# Altium PCB carsystem.PcbDoc
Units mil, origin at the board's own origin, x right, y up, seen from the top; angles counter-clockwise.
Board outline 6000 x 4000 mil, 2 copper layers (Top Layer, Bottom Layer); 3 components, 10 nets, 80 pads, 0 vias.
Unrouted connection lines stored in the file: 9.
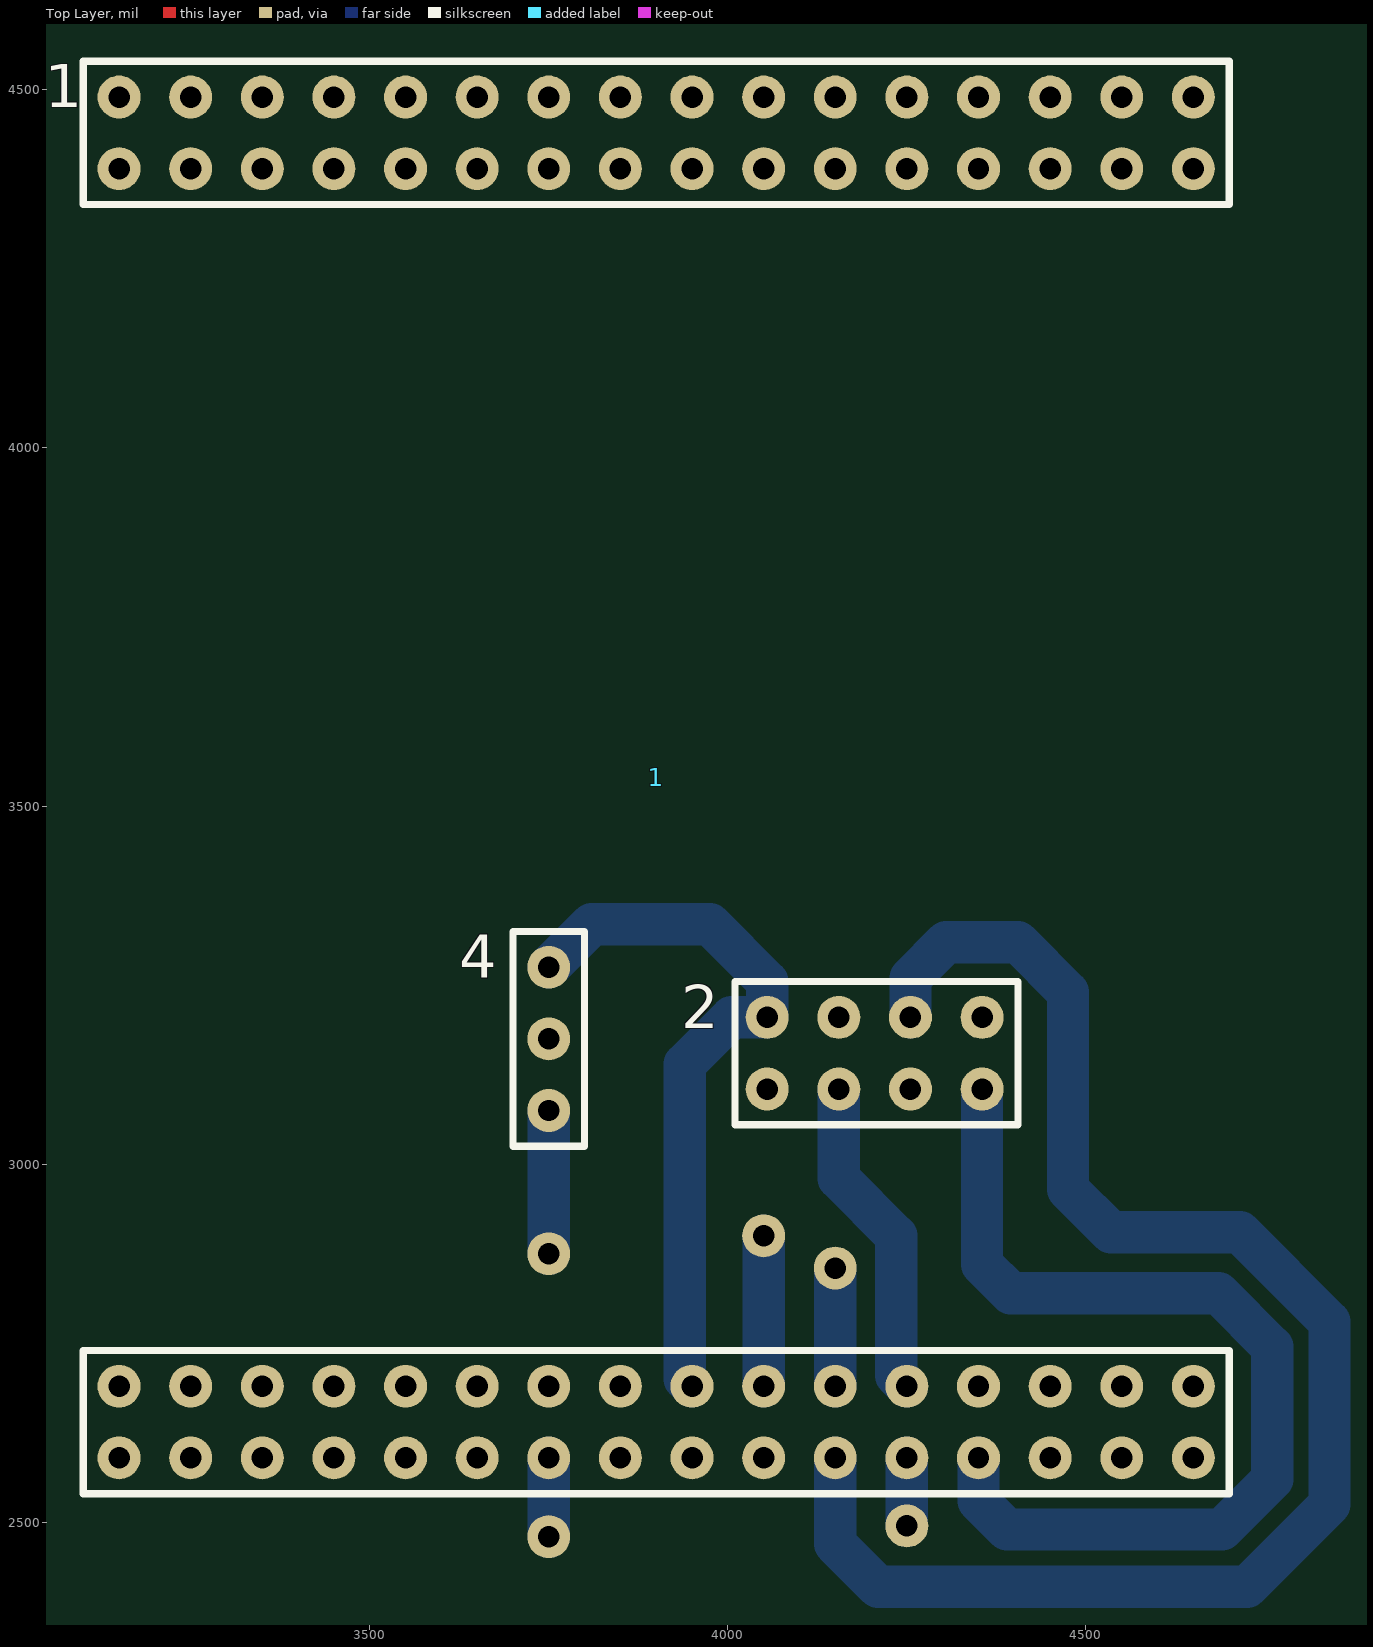
[diagram p0: Top Layer view]
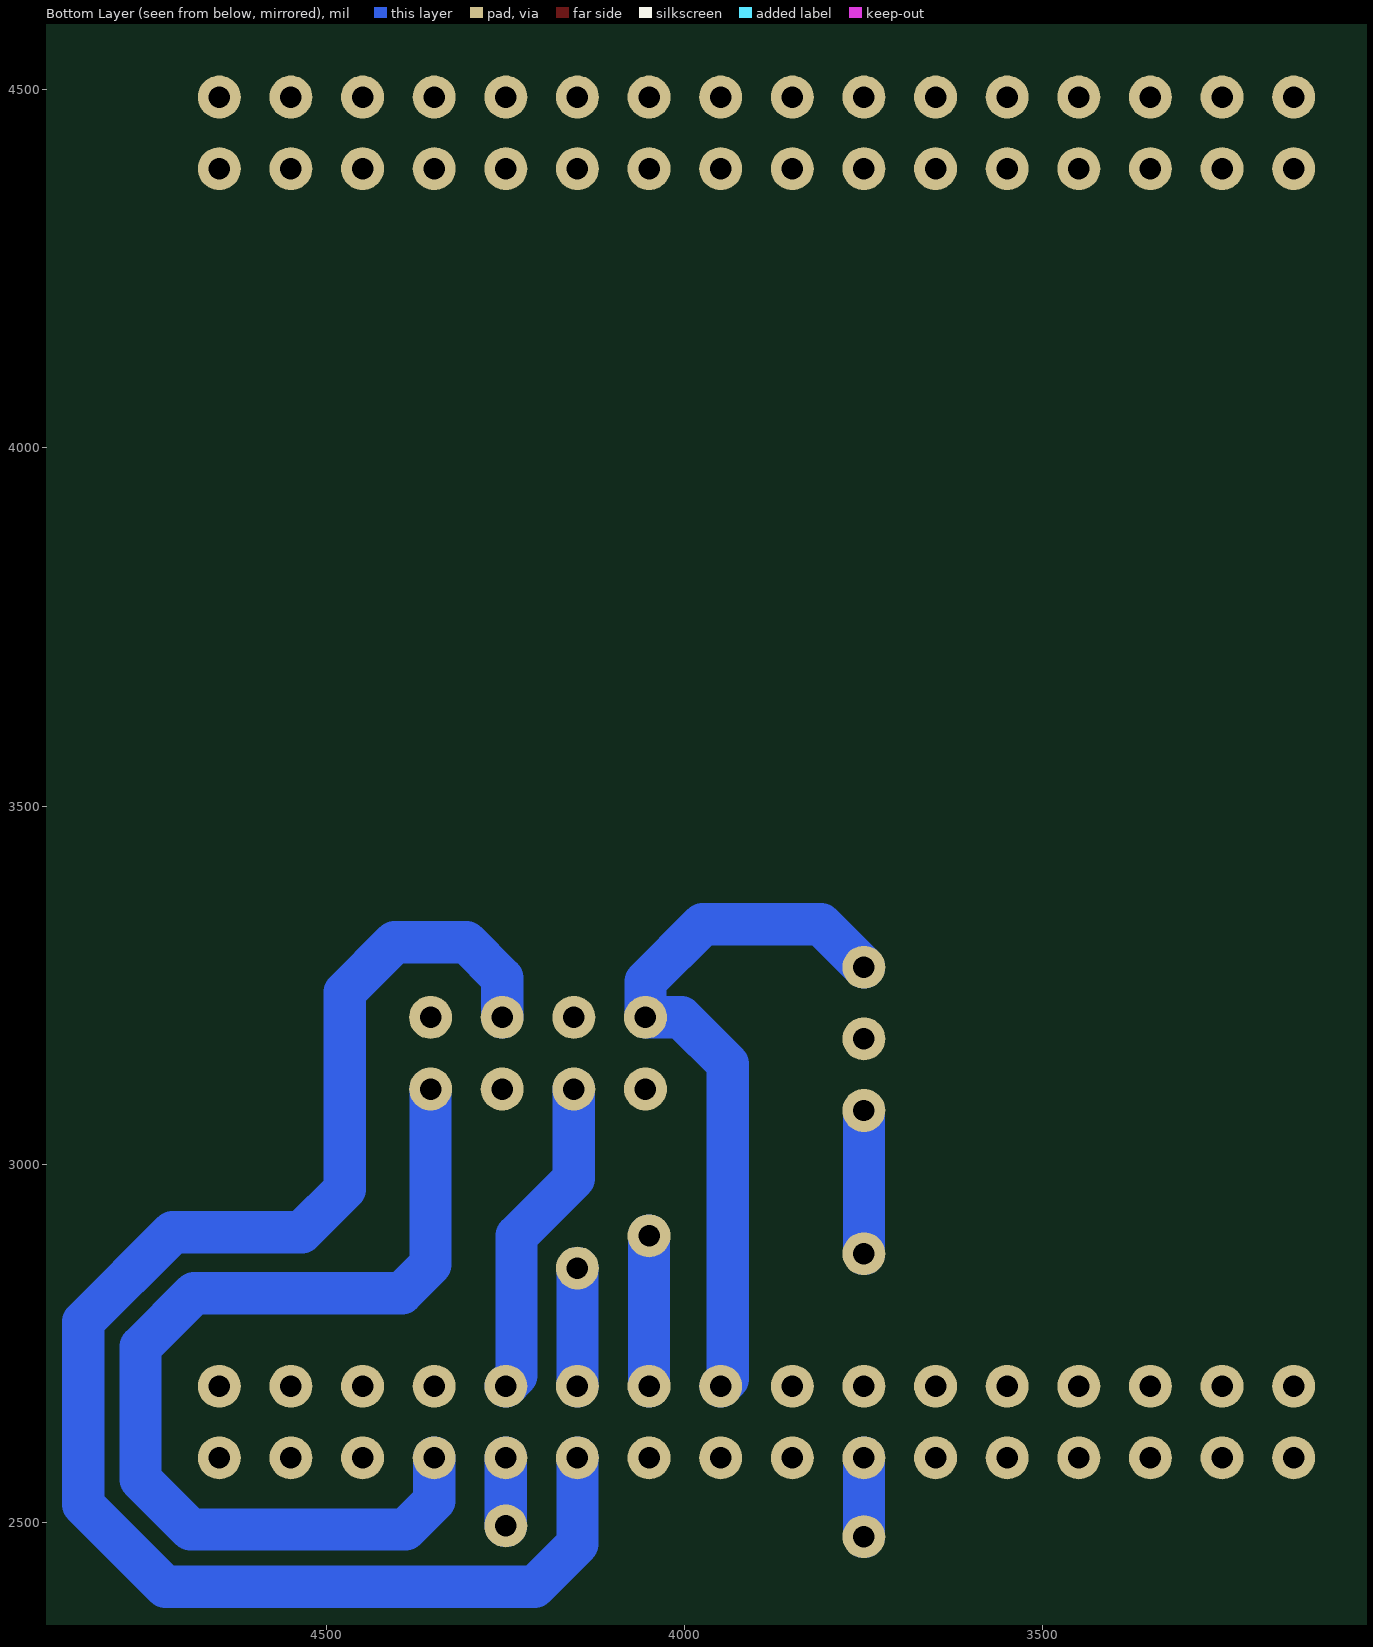
[diagram p1: Bottom Layer view, seen from below]

## Layer stack, top to bottom
Top Solder: solder mask 0.4, Solder Resist, Dk 3.5
Top Layer: signal copper 1.4
Dielectric 1: dielectric 12.6, FR-4, Dk 4.8
Bottom Layer: signal copper 1.4
Bottom Solder: solder mask 0.4, Solder Resist, Dk 3.5

## Board outline
1000,1000 7000,1000 7000,5000 1000,5000

## Design rules (kind name [scope] priority, off if disabled: settings)
Clearance [All] p1: gap=10
PolygonConnect [All] p1: connectstyle=Relief reliefconductorwidth=10 reliefentries=4 polygonreliefangle="90 Angle" airgapwidth=10
RoutingVias [All] p1: holewidth=28 width=50 viastyle="Through Hole" minholewidth=28 minwidth=50 maxholewidth=28 maxwidth=50
SolderMaskExpansion [All] p1: expansion=4
Width [All] p1: maxlimit=59.06 minlimit=59.06 preferedwidth=59.06
29 further rules are at their usual default settings.

## Components (designator, comment, footprint, x,y, rotation, side; value= is the part's Value field where it differs from the comment)
1 "STM32-YL08" STM32-YL08 3150,2590 r90 top
2 "RF2401L" RF2401L 4055,3205 r270 top
4 "18B20" 18B20 3750,3075 r0 top

## Footprints (in the part's own frame and the unit in brackets; to place one, negate y for a bottom-side part, rotate by r counter-clockwise, add the part's x,y. Pads: shape width x height; smd on the part's side, far side on the other; paste and mask are expansions set on the pad)
18B20 [mil]
  round 60 hole 30: 1(0,0) 2(0,100) 3(0,200)
  silkscreen extent -50,-50 50,250
RF2401L [mil]
  round 60 hole 30: 1(0,0) 2(0,100) 3(0,200) 4(0,300) 5(100,300) 6(100,200) 7(100,100) 8(100,0)
  silkscreen extent -50,-45 150,350
STM32-YL08 [mil]
  round 60 hole 30: 1(0,0) 2(0,-100) 3(0,-200) 4(0,-300) 5(0,-400) 6(0,-500) 7(0,-600) 8(0,-700) 9(0,-800) 10(0,-900) 11(0,-1000) 12(0,-1100) 13(0,-1200) 14(0,-1300) 15(0,-1400) 16(0,-1500) 17(100,-1500) 18(100,-1400) 19(100,-1300) 20(100,-1200) 21(100,-1100) 22(100,-1000) 23(100,-900) 24(100,-800) 25(100,-700) 26(100,-600) 27(100,-500) 28(100,-400) 29(100,-300) 30(100,-200) 31(100,-100) 32(100,0) 33(1800,-1500) 34(1800,-1400) 35(1800,-1300) 36(1800,-1200) 37(1800,-1100) 38(1800,-1000) 39(1800,-900) 40(1800,-800) 41(1800,-700) 42(1800,-600) 43(1800,-500) 44(1800,-400) 45(1800,-300) 46(1800,-200) 47(1800,-100) 48(1800,0) 49(1900,0) 50(1900,-100) 51(1900,-200) 52(1900,-300) 53(1900,-400) 54(1900,-500) 55(1900,-600) 56(1900,-700) 57(1900,-800) 58(1900,-900) 59(1900,-1000) 60(1900,-1100) 61(1900,-1200) 62(1900,-1300) 63(1900,-1400) 64(1900,-1500)
  silkscreen extent -50,-1550 1950,50

## Free pads (board coordinates)
  round 60 hole 30: 0(4050,2900) 1(4150,2855) 3(3750,2875) 4(3750,2480) 5(4250,2495)

## Nets (pads, with @x,y where several pads share a name; then routed paths per layer and width w, separated by ;. In a path a pad name is that pad's centre, name@x,y a point inside that pad or via, vN(x,y) a via of type N, cw(c..) or ccw(c..) an arc to the next point about the centre after c; other vN are vias at no path point)
3.3: 1.7 1.10 1.17 2.8 4.1 pad.3 pad.4 | length 310
  Bottom Layer w59.06: pad.4 1.7 ; pad.3 4.1
A4: 1.23 2.2 pad.0 | length 210
  Bottom Layer w59.06: 1.23 pad.0
A5: 1.11 2.3 | length 2178.8
  Bottom Layer w59.06: 1.11 4150,2470 4210,2410 4725,2410 4840,2525 4840,2780 4715,2905 4535,2905 4475,2965 4475,3240 4405,3310 4305,3310 4255,3260 2.3
A6: 1.22 2.4 pad.1 | length 165
  Bottom Layer w59.06: 1.22 pad.1
A7: 1.12 2.6 pad.5 | length 95
  Bottom Layer w59.06: pad.5 1.12
A11: 1.54 4.2
B10: 1.15
C4: 1.21 2.7 | length 454.4
  Bottom Layer w59.06: 2.7 4155,2980 4235,2900 4235,2705 1.21
C5: 1.13 2.5 | length 1398.2
  Bottom Layer w59.06: 1.13 4350,2530 4390,2490 4690,2490 4760,2560 4760,2745 4685,2820 4395,2820 4355,2860 2.5
GND: 1.16 1.24 2.1 4.3 | length 1009.1
  Bottom Layer w59.06: 4.3 3810,3335 3975,3335 4055,3255 2.1 4005,3205 3940,3140 3940,2700 1.24
pads on no net: 1.1 1.2 1.3 1.4 1.5 1.6 1.8 1.9 1.14 1.18 1.19 1.20 1.25 1.26 1.27 1.28 1.29 1.30 1.31 1.32 1.33 1.34 1.35 1.36 1.37 1.38 1.39 1.40 1.41 1.42 1.43 1.44 1.45 1.46 1.47 1.48 1.49 1.50 1.51 1.52 1.53 1.55 1.56 1.57 1.58 1.59 1.60 1.61 1.62 1.63 1.64